# EAGLE board PCBFinal (EAGLE 8.3.2)
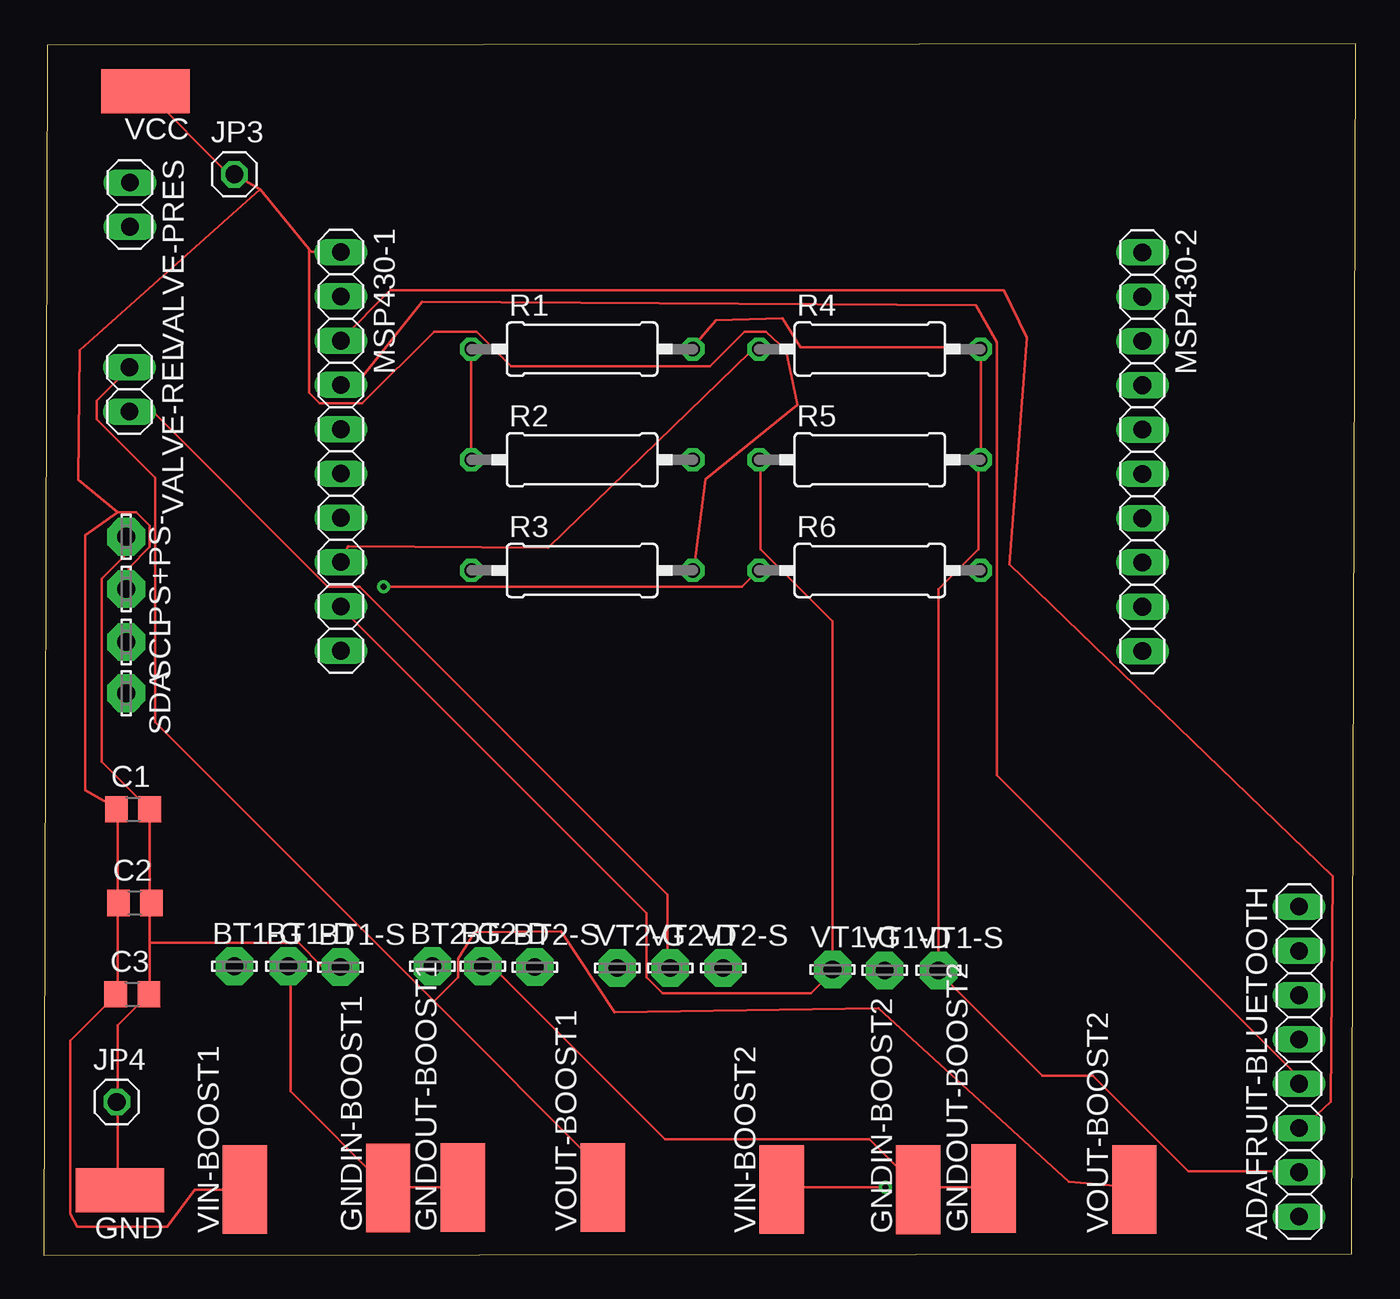
[diagram p0: board, top side]
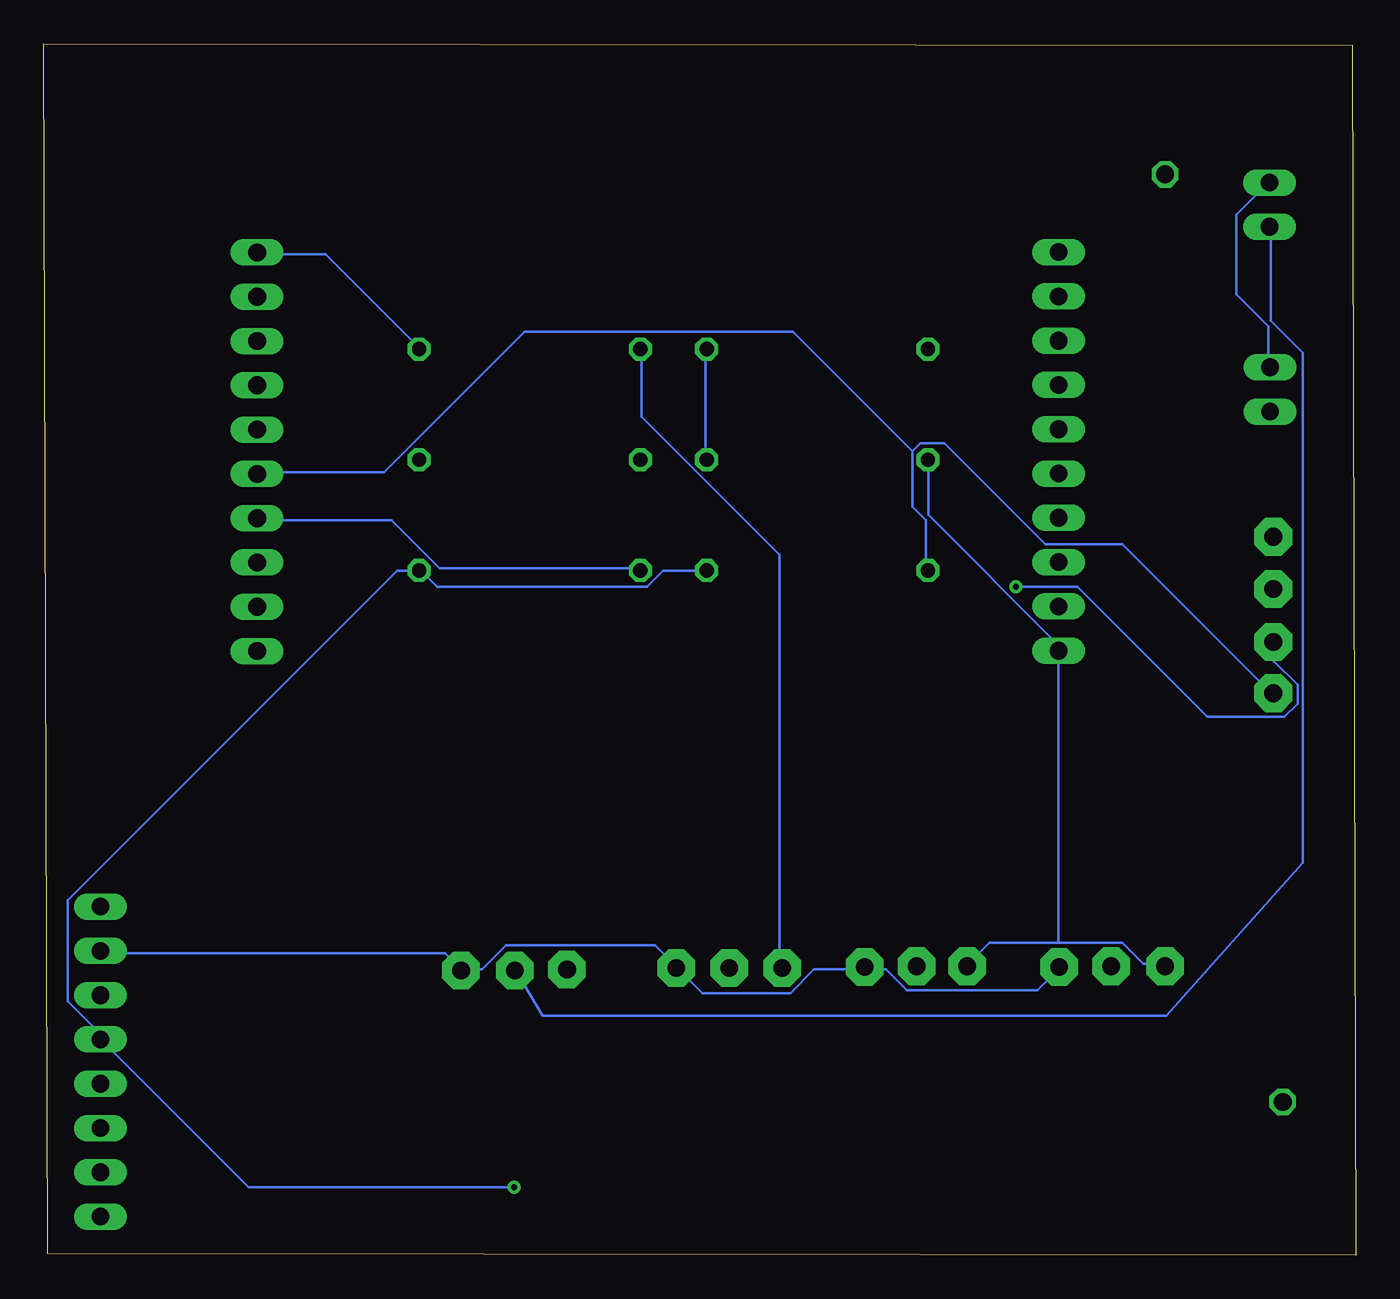
[diagram p1: board, bottom side, seen from below]

Size 75.3 x 69.5 mm. Coordinates in mm from the lower left corner, seen from the top.
Outline: 0,0 75.05,0.1 75.3,69.5 0.2,69.4 0,0
Copper layers (1*16): Top 0.035mm / dielectric 1.5mm / Bottom 0.035mm
Design rules "default": minimum track width 6mil, minimum drill 0.35mm, track to track 6mil, track to pad 6mil, pad to pad 6mil, via to via 6mil, smd to smd 6mil, copper to edge 40mil, drill to drill 6mil, minimum pad ring 10mil, minimum via ring 8mil, stop-mask expansion 4mil, vias tented up to drill 0mil, thermal gap 10mil

## Footprints (pad centres in the part's own frame; a part is rotated, then mirrored left to right if it is on the bottom)
1X08 = drill 1.016 long: 1 -8.89,0; 2 -6.35,0; 3 -3.81,0; 4 -1.27,0; 5 1.27,0; 6 3.81,0; 7 6.35,0; 8 8.89,0
LSP10 = drill 1.016 pad 2.159 octagon: MP 0,0
C0805 = smd 1.3 x 1.5: 1 -0.95,0; 2 0.95,0
SMD2,54-5,08 = smd 2.54 x 5.08: 1 0,0
1X01 = drill 1.016 octagon: 1 0,0
1X10 = drill 1.016 long: 1 -11.43,0; 2 -8.89,0; 3 -6.35,0; 4 -3.81,0; 5 -1.27,0; 6 1.27,0; 7 3.81,0; 8 6.35,0; 9 8.89,0; 10 11.43,0
0309/12 = drill 0.813 octagon: 1 -6.35,0; 2 6.35,0
1X02 = drill 1.016 long: 1 -1.27,0; 2 1.27,0

## Placement (x,y rotation side)
ADAFRUIT-BLUETOOTH  [1X08]  72.04,11.11 90 top
BT1-D  LSP10  [LSP10]  14.04,16.58 0 top
BT1-G  LSP10  [LSP10]  10.95,16.58 0 top
BT1-S  LSP10  [LSP10]  17.03,16.53 0 top
BT2-D  LSP10  [LSP10]  25.2,16.58 0 top
BT2-G  LSP10  [LSP10]  22.31,16.58 0 top
BT2-S  LSP10  [LSP10]  28.19,16.53 0 top
C1  10u  [C0805]  5.14,25.59 0 top
C2  0.1u  [C0805]  5.24,20.21 0 top
C3  0.1u  [C0805]  5.09,14.98 0 top
GND  [SMD2,54-5,08]  4.39,3.73 90 top
GNDIN-BOOST1  [SMD2,54-5,08]  19.77,3.87 0 top
GNDIN-BOOST2  [SMD2,54-5,08]  50.19,3.76 0 top
GNDOUT-BOOST1  [SMD2,54-5,08]  24.05,3.88 0 top
GNDOUT-BOOST2  [SMD2,54-5,08]  54.52,3.83 0 top
JP3  [1X01]  10.95,62 0 top
JP4  [1X01]  4.2,8.8 0 top
MSP430-1  [1X10]  17.06,46.11 270 top
MSP430-2  [1X10]  63.05,46.09 270 top
PS+  LSP10  [LSP10]  4.74,38.22 270 top
PS-  LSP10  [LSP10]  4.74,41.21 270 top
R1  10K  [0309/12]  30.9,51.98 0 top
R2  10K  [0309/12]  30.9,45.63 0 top
R3  4.7K  [0309/12]  30.9,39.28 0 top
R4  10K  [0309/12]  47.41,51.98 0 top
R5  10K  [0309/12]  47.41,45.63 0 top
R6  4.7K  [0309/12]  47.41,39.28 0 top
SCL  LSP10  [LSP10]  4.74,35.18 270 top
SDA  LSP10  [LSP10]  4.74,32.24 270 top
VALVE-PRES  [1X02]  4.95,60.26 270 top
VALVE-REL  [1X02]  4.92,49.66 270 top
VCC  [SMD2,54-5,08]  5.84,66.77 90 top
VIN-BOOST1  [SMD2,54-5,08]  11.56,3.78 0 top
VIN-BOOST2  [SMD2,54-5,08]  42.35,3.78 0 top
VOUT-BOOST1  [SMD2,54-5,08]  32.08,3.88 0 top
VOUT-BOOST2  [SMD2,54-5,08]  62.58,3.78 0 top
VT1-D  LSP10  [LSP10]  48.26,16.34 0 top
VT1-G  LSP10  [LSP10]  45.27,16.39 0 top
VT1-S  LSP10  [LSP10]  51.35,16.34 0 top
VT2-D  LSP10  [LSP10]  35.96,16.48 0 top
VT2-G  LSP10  [LSP10]  32.92,16.48 0 top
VT2-S  LSP10  [LSP10]  39,16.48 0 top

## Library data of the parts
ADAFRUIT-BLUETOOTH JP3 JP4 MSP430-1 MSP430-2 VALVE-PRES VALVE-REL = pinhead
BT1-D BT1-G BT1-S BT2-D BT2-G BT2-S PS+ PS- SCL SDA VT1-D VT1-G VT1-S VT2-D VT2-G VT2-S = solpad
C1-C3 R1-R6 = resistor
GND GNDIN-BOOST1 GNDIN-BOOST2 GNDOUT-BOOST1 GNDOUT-BOOST2 VCC VIN-BOOST1 VIN-BOOST2 VOUT-BOOST1 VOUT-BOOST2 = wirepad

## Nets
N$1: MSP430-2.7 R6.1 SCL.MP
N$3: MSP430-2.6 R3.1 SDA.MP
N$4: ADAFRUIT-BLUETOOTH.5 C1.1 C2.1 C3.1 JP3.1 MSP430-1.1 PS+.MP R3.2 R6.2 VCC.1 VIN-BOOST1.1 VIN-BOOST2.1
N$5: ADAFRUIT-BLUETOOTH.3 MSP430-1.3
N$6: ADAFRUIT-BLUETOOTH.4 MSP430-1.4
N$7: VALVE-PRES.1 VALVE-REL.1 VOUT-BOOST1.1 VOUT-BOOST2.1
N$8: ADAFRUIT-BLUETOOTH.2 ADAFRUIT-BLUETOOTH.7 BT1-S.MP BT2-S.MP C1.2 C2.2 C3.2 GND.1 JP4.1 MSP430-2.1 PS-.MP R1.2 R2.2 R4.2 R5.2 VT1-S.MP VT2-S.MP
N$9: MSP430-1.8 R4.1 VT2-G.MP
N$10: BT1-G.MP BT2-G.MP MSP430-1.10 R1.1 R2.1
N$11: MSP430-1.9 R5.1 VT1-G.MP
N$12: VALVE-PRES.2 VT1-D.MP
N$13: VALVE-REL.2 VT2-D.MP
N$14: BT1-D.MP GNDIN-BOOST1.1 GNDOUT-BOOST1.1
N$15: BT2-D.MP GNDIN-BOOST2.1 GNDOUT-BOOST2.1

## Tracks (layer width: path | path; a pad name or v marks a point on that pad's centre or on a via)
N$1  (via drill 0.35)
  Top 0.152: v19.5,38.35 40.08,38.35 40.99,39.27 R6.1
  Bottom 0.152: R6.1 41.14,39.42 52.57,39.42 55.32,42.16 62.94,42.16 MSP430-2.7 | v19.5,38.35 16,38.35 8.53,30.88 4.11,30.88 3.35,31.65 3.35,32.71 4.72,34.09 4.72,35.15 SCL.MP
N$3
  Bottom 0.152: 25.45,46.12 25.45,42.92 24.68,42.16 24.68,39.42 R3.1 | 25.45,46.12 24.99,46.58 23.62,46.58 17.83,40.79 13.41,40.79 4.87,32.26 SDA.MP | 25.45,46.12 32.3,52.98 47.7,52.98 55.77,44.91 62.94,44.91 MSP430-2.6
N$4  (via drill 0.35)
  Top 0.152: v48.31,3.91 42.36,3.91 VIN-BOOST2.1 | VCC.1 5.94,66.7 10.51,62.13 10.82,62.13 JP3.1 10.97,61.98 12.44,61.15 | 12.44,61.15 15.24,57.71 | 15.24,57.71 15.39,57.55 16.91,57.55 MSP430-1.1 | 4.26,42.62 5.33,42.62 6.09,41.86 6.09,40.64 4.87,39.42 4.87,38.35 PS+.MP | 4.26,42.62 2.39,41.3 2.39,26.67 4.11,25.7 C1.1 4.26,25.55 4.26,20.22 C2.1 4.26,20.06 4.26,15.04 C3.1 4.11,14.88 1.52,12.29 1.52,2.39 1.92,1.63 7.11,1.63 8.68,3.76 11.43,3.76 VIN-BOOST1.1 | 12.44,61.15 2.09,51.9 1.99,44.49 4.26,42.62 | 15.24,57.71 15.24,49.48 15.85,48.87 18.28,48.87 22.4,52.98 24.84,52.98 26.82,51 38.25,51 40.23,52.98 41.45,52.98 42.61,51.92 43.26,48.77 37.98,44.5 37.33,39.42 R3.2
  Bottom 0.152: R3.2 37.33,39.27 39.77,39.27 40.69,38.35 52.73,38.35 53.64,39.27 R6.2 53.79,39.27 55.01,39.27 73.91,20.37 73.91,14.58 72.08,12.75 72.08,12.45 ADAFRUIT-BLUETOOTH.5 71.93,12.29 63.55,3.91 v48.31,3.91
N$5
  Top 0.152: ADAFRUIT-BLUETOOTH.3 71.83,6.92 73.86,8.79 73.96,21.74 55.41,39.64 56.41,52.63 55.09,55.35 19.89,55.35 17.06,52.53 MSP430-1.3
N$6
  Top 0.152: ADAFRUIT-BLUETOOTH.4 71.93,9.85 71.93,10.31 54.71,27.53 54.71,52.37 53.49,54.49 21.72,54.69 18.06,50.13 MSP430-1.4
N$7
  Top 0.152: 22.4,14.58 6.4,30.58 6.4,44.6 3.04,47.95 3.04,49.02 4.87,50.85 VALVE-REL.1 | 22.4,14.58 32,4.98 32,3.91 VOUT-BOOST1.1 | 22.4,14.58 23.77,15.95 23.77,17.02 24.73,18.53 29.7,18.58 32.75,13.93 47.9,14.18 58.82,4.21 62.48,3.91 VOUT-BOOST2.1
  Bottom 0.152: VALVE-REL.1 5.02,51 5.02,53.29 6.85,55.12 6.85,59.69 5.02,61.52 VALVE-PRES.1
N$8
  Top 0.152: R1.2 37.33,52.07 37.16,51.97 38.58,53.64 42.41,53.74 43.43,52.07 53.64,52.07 R4.2 53.79,51.92 53.79,45.67 R5.2 53.64,45.52 53.64,40.49 51.35,38.2 51.35,16.41 VT1-S.MP 51.35,16.25 57.3,10.31 60.19,10.31 65.68,4.82 71.93,4.82 ADAFRUIT-BLUETOOTH.2 | GND.1 4.26,3.76 4.26,8.79 JP4.1 4.26,8.94 4.26,13.21 5.94,14.88 C3.2 6.09,15.04 6.09,17.93 | 6.09,17.93 6.09,20.06 C2.2 6.09,20.22 6.09,25.55 C1.2 5.94,25.7 3.35,28.29 3.35,38.81 4.72,40.18 4.72,41.1 PS-.MP | 6.09,17.93 14.63,17.93 16,16.56 16.91,16.56 BT1-S.MP
  Bottom 0.152: R2.2 37.33,45.67 37.33,51.92 R1.2 | MSP430-2.1 62.94,57.4 59.13,57.4 53.79,52.07 R4.2 | ADAFRUIT-BLUETOOTH.7 71.93,17.32 52.27,17.32 51.35,16.41 VT1-S.MP 51.2,16.41 50.13,16.41 48.76,17.78 40.23,17.78 39.01,16.56 VT2-S.MP 38.86,16.41 37.49,15.04 32.46,15.04 31.09,16.41 28.34,16.41 BT2-S.MP 28.19,16.41 26.97,16.41 25.75,15.19 18.28,15.19 17.06,16.41 BT1-S.MP
N$9
  Top 0.152: R4.1 40.99,51.92 40.57,51.82 28.93,40.58 17.47,40.68 17.06,39.88 MSP430-1.8
  Bottom 0.152: VT2-G.MP 33.07,16.56 33.07,40.18 40.99,48.11 40.99,51.92 R4.1
N$10
  Top 0.152: R2.1 24.53,45.67 24.53,51.92 R1.1
  Bottom 0.152: 17.06,17.93 21.03,17.93 22.25,16.71 BT2-G.MP | 17.06,17.93 13.41,17.93 12.19,16.71 10.97,16.71 BT1-G.MP | R2.1 24.53,45.52 24.53,42.47 17.06,35 17.06,34.7 MSP430-1.10 17.06,34.54 17.06,17.93
N$11
  Top 0.152: R5.1 41.14,45.52 41.14,40.49 45.26,36.37 45.26,16.41 VT1-G.MP 45.26,16.25 44.04,15.04 35.5,15.04 34.59,15.95 34.59,19.61 17.06,37.13 MSP430-1.9
N$12
  Bottom 0.152: VALVE-PRES.2 4.87,58.93 4.87,53.59 3.04,51.76 3.04,22.5 10.87,13.73 46.68,13.73 48.15,16.25 VT1-D.MP
N$13
  Top 0.152: VALVE-REL.2 5.02,48.26 6.4,48.26 16.3,38.35 18.13,38.35 35.81,20.67 35.81,16.56 VT2-D.MP
N$14
  Top 0.152: BT1-D.MP 14.17,16.56 14.17,9.4 19.66,3.91 GNDIN-BOOST1.1 19.81,3.91 23.92,3.91 GNDOUT-BOOST1.1
N$15
  Top 0.152: BT2-D.MP 25.29,16.56 25.75,16.56 35.66,6.65 47.39,6.65 50.13,3.91 GNDIN-BOOST2.1 50.29,3.91 54.4,3.91 GNDOUT-BOOST2.1